# Altium PCB TwoChipAdapter.PcbDoc
Units mil, origin at the board's own origin, x right, y up, seen from the top; angles counter-clockwise.
Board outline 700 x 2400 mil, 2 copper layers (Top Layer, Bottom Layer); 20 components, 19 nets, 80 pads, 17 vias.
Unrouted connection lines stored in the file: 2.
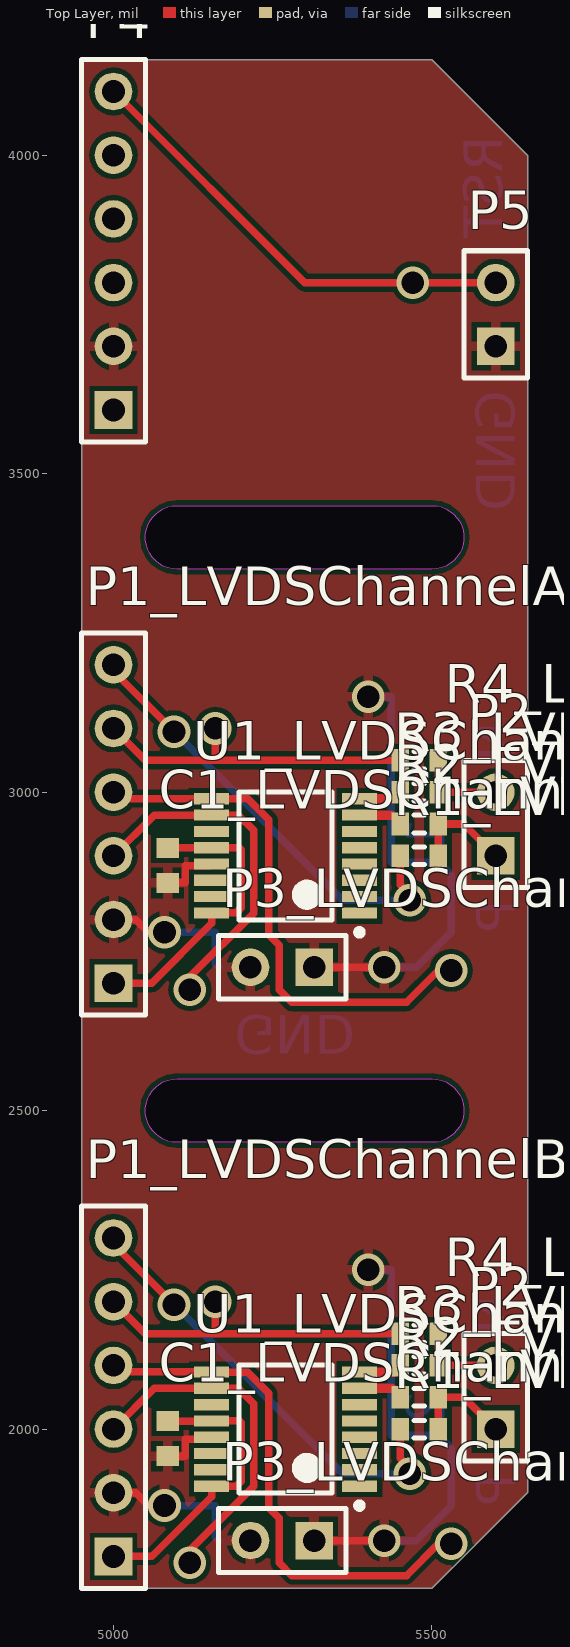
[diagram p0: Top Layer view]
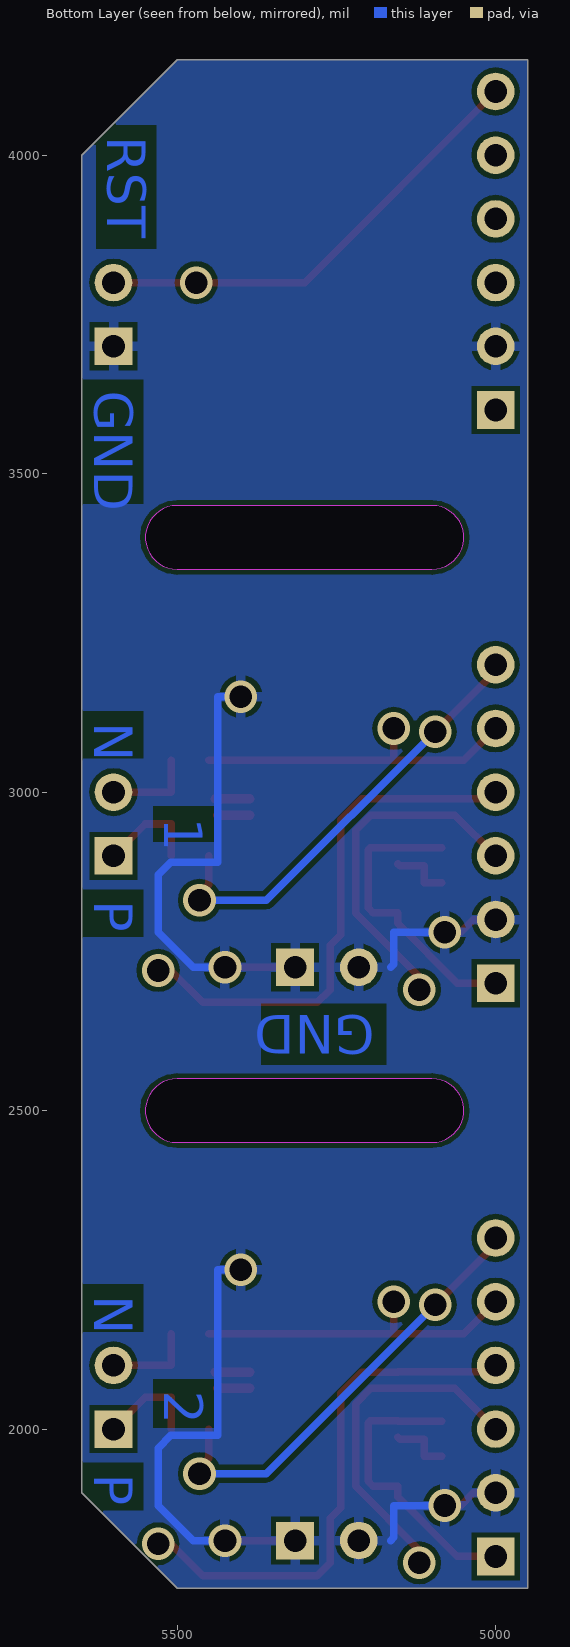
[diagram p1: Bottom Layer view, seen from below]

## Layer stack, top to bottom
Top Solder: solder mask 0.4, Solder Resist, Dk 3.5
Top Layer: signal copper 1.4
Dielectric 1: dielectric 12.6, FR-4, Dk 4.8
Bottom Layer: signal copper 1.4
Bottom Solder: solder mask 0.4, Solder Resist, Dk 3.5

## Board outline
4950,4150 5500,4150 5650,4000 5650,1900 5500,1750 4950,1750 4950,4150
cut-out: 5100,2450 cw(c5100,2500) 5100,2550 5500,2550 cw(c5500,2500) 5500,2450
cut-out: 5100,3350 cw(c5100,3400) 5100,3450 5500,3450 cw(c5500,3400) 5500,3350
board region "Default Layer Stack Region": 5650,3400 5650,2500 4950,2500 4950,3400
board region "Default Layer Stack Region": 5650,2500 5650,1900 5500,1750 4950,1750 4950,2500
board region "Default Layer Stack Region": 4950,3400 4950,4150 5500,4150 5650,4000 5650,3400

## Design rules (kind name [scope] priority, off if disabled: settings)
Clearance [All] p1: gap=7.87
DiffPairsRouting [All] p1: maxlimit=10 minlimit=10 mostfreqgap=10 toplayer_minwidth=15 toplayer_maxwidth=15 toplayer_prefwidth=15 bottomlayer_minwidth=15 bottomlayer_maxwidth=15 bottomlayer_prefwidth=15 maxuncoupledlength=500
PolygonConnect [All] p1: connectstyle=Relief reliefconductorwidth=15.75 reliefentries=4 polygonreliefangle="90 Angle" airgapwidth=7.87
RoomDefinition TopAdapter [InComponentClass('TopAdapter')] p1: confinementstyle=ConfineIn formatcopy=TRUE lockcomponents=FALSE outline 4900,3500 5700,3500 5700,4200 4900,4200
RoomDefinition LVDSChannelB [InComponentClass('LVDSChannelB')] p2: confinementstyle=ConfineIn formatcopy=TRUE lockcomponents=FALSE outline 4900,1700 5700,1700 5700,2400 4900,2400
RoomDefinition LVDSChannelA [InComponentClass('LVDSChannelA')] p3: confinementstyle=ConfineIn formatcopy=TRUE lockcomponents=FALSE outline 4900,2600 5700,2600 5700,3300 4900,3300
RoutingVias [All] p1: holewidth=35.43 width=47.24 viastyle="Through Hole" minholewidth=31.5 minwidth=47.24 maxholewidth=39.37 maxwidth=55.12
SolderMaskExpansion [All] p1: expansion=4
UnpouredPolygon [All] p1: allowunpoured=FALSE
Width [All] p1: maxlimit=39.37 minlimit=9.84 preferedwidth=10
28 further rules are at their usual default settings.

## Classes and differential pairs
channel class LVDS_Channel: LVDSChannelA LVDSChannelB
component class LVDSChannelB: C1_LVDSChannelB P1_LVDSChannelB P2_LVDSChannelB P3_LVDSChannelB R1_LVDSChannelB R2_LVDSChannelB R3_LVDSChannelB R4_LVDSChannelB U1_LVDSChannelB
component class LVDSChannelA: C1_LVDSChannelA P1_LVDSChannelA P2_LVDSChannelA P3_LVDSChannelA R1_LVDSChannelA R2_LVDSChannelA R3_LVDSChannelA R4_LVDSChannelA U1_LVDSChannelA
component class TopAdapter: P4 P5
differential pair DOUT1_LVDSChannelB: +DOUT1_LVDSChannelB_P -DOUT1_LVDSChannelB_N
differential pair DOUT1_LVDSChannelA: +DOUT1_LVDSChannelA_P -DOUT1_LVDSChannelA_N

## Components (designator, comment, footprint, x,y, rotation, side; value= is the part's Value field where it differs from the comment)
C1_LVDSChannelA "Cap Semi" 1608[0603] 5085,2885 r90 top (schematic designator C1)
C1_LVDSChannelB "Cap Semi" 1608[0603] 5085,1985 r90 top (schematic designator C1)
P1_LVDSChannelA "Header 6" HDR1X6 5000,2700 r90 top (schematic designator P1)
P1_LVDSChannelB "Header 6" HDR1X6 5000,1800 r90 top (schematic designator P1)
P2_LVDSChannelA "Header 2" HDR1X2 5600,2900 r90 top (schematic designator P2)
P2_LVDSChannelB "Header 2" HDR1X2 5600,2000 r90 top (schematic designator P2)
P3_LVDSChannelA "Header 2" HDR1X2 5315,2725 r180 top (schematic designator P3)
P3_LVDSChannelB "Header 2" HDR1X2 5315,1825 r180 top (schematic designator P3)
P4 "Header 6" HDR1X6 5000,3600 r90 top
P5 "Header 2" HDR1X2 5600,3700 r90 top
R1_LVDSChannelA "Res3" J1-0603 5480,2900 r180 top (schematic designator R1)
R1_LVDSChannelB "Res3" J1-0603 5480,2000 r180 top (schematic designator R1)
R2_LVDSChannelA "Res3" J1-0603 5480,2950 r180 top (schematic designator R2)
R2_LVDSChannelB "Res3" J1-0603 5480,2050 r180 top (schematic designator R2)
R3_LVDSChannelA "Res3" J1-0603 5480,3000 r180 top (schematic designator R3)
R3_LVDSChannelB "Res3" J1-0603 5480,2100 r180 top (schematic designator R3)
R4_LVDSChannelA "Res3" J1-0603 5480,3050 r0 top (schematic designator R4)
R4_LVDSChannelB "Res3" J1-0603 5480,2150 r0 top (schematic designator R4)
U1_LVDSChannelA "SN65LVDS049" SOP127P600-8N 5270,2900 r180 top (schematic designator U1)
U1_LVDSChannelB "SN65LVDS049" SOP127P600-8N 5270,2000 r180 top (schematic designator U1)

## Footprints (in the part's own frame and the unit in brackets; to place one, negate y for a bottom-side part, rotate by r counter-clockwise, add the part's x,y. Pads: shape width x height; smd on the part's side, far side on the other; paste and mask are expansions set on the pad)
1608[0603] [mm] "Chip Capacitor, Body 1.6x0.8mm, IPC High Density"
  rect 0.8x0.9 smd: 1(-0.7,0) 2(0.7,0)
  body extent -0.87,-0.48 0.87,0.48, height 1.3
HDR1X2 [mm] "Connector; Header; 2 Position"
  rect 1.5x1.5 hole 0.9: 1(0,0)
  round 1.5 hole 0.9: 2(2.54,0)
  silkscreen extent -1.27,-1.27 3.81,1.27
HDR1X6 [mm] "Connector; Header; 6 Position"
  rect 1.5x1.5 hole 0.9: 1(0,0)
  round 1.5 hole 0.9: 2(2.54,0) 3(5.08,0) 4(7.62,0) 5(10.16,0) 6(12.7,0)
  silkscreen extent -1.27,-1.27 13.97,1.27
J1-0603 [mm] "Chip Resistor, Body 1.6x0.8mm, IPC High Density"
  rect 0.7x0.9 smd: 1(-0.75,0) 2(0.75,0)
  silkscreen extent -0.2,-0.35 0.2,0.35, body extent -0.85,-0.48 0.85,0.48, height 0.9
SOP127P600-8N [mm]
  rect 1.4x0.45 smd: 1(-2.95,2.275) 2(-2.95,1.625) 3(-2.95,0.975) 4(-2.95,0.325) 5(-2.95,-0.325) 6(-2.95,-0.975) 7(-2.95,-1.625) 8(-2.95,-2.275) 9(2.95,-2.275) 10(2.95,-1.625) 11(2.95,-0.975) 12(2.95,-0.325) 13(2.95,0.325) 14(2.95,0.975) 15(2.95,1.625) 16(2.95,2.275)
  silkscreen extent -3.08,-2.55 1.85,3.17, body extent -2.25,-2.55 2.25,2.55, height 1.2

## Part data
C1_LVDSChannelA C1_LVDSChannelB: "Capacitor (Semiconductor SIM Model)"
P1_LVDSChannelA P1_LVDSChannelB P4: "Header, 6-Pin"
P2_LVDSChannelA P2_LVDSChannelB P3_LVDSChannelA P3_LVDSChannelB P5: "Header, 2-Pin"
R1_LVDSChannelA R1_LVDSChannelB R2_LVDSChannelA R2_LVDSChannelB R3_LVDSChannelA R3_LVDSChannelB R4_LVDSChannelA R4_LVDSChannelB: "Resistor"

## Via types
v1: diameter 51.18, hole 35.43, Top Layer to Bottom Layer, 17 vias

## Nets (pads, with @x,y where several pads share a name; then routed paths per layer and width w, separated by ;. In a path a pad name is that pad's centre, name@x,y a point inside that pad or via, vN(x,y) a via of type N, cw(c..) or ccw(c..) an arc to the next point about the centre after c; other vN are vias at no path point)
3V3: C1_LVDSChannelA.2 C1_LVDSChannelB.2 P1_LVDSChannelA.1 P1_LVDSChannelB.1 P4.1 U1_LVDSChannelA.12 U1_LVDSChannelA.16 U1_LVDSChannelB.12 U1_LVDSChannelB.16 | length 942.7
  Top Layer w11.81: P1_LVDSChannelB.1@5000,1790 5010,1800 5060,1800 5153.86,1893.86 U1_LVDSChannelB.16 5192.59,1910.43 5200.31,1918.15 5200.31,2009.68 5197.2,2012.8 U1_LVDSChannelB.12 5153.62,2012.56 C1_LVDSChannelB.2 ; P1_LVDSChannelA.1@5000,2690 5010,2700 5060,2700 5153.86,2793.86 U1_LVDSChannelA.16 5192.59,2810.43 5200.31,2818.15 5200.31,2909.68 5197.2,2912.8 U1_LVDSChannelA.12 5153.62,2912.56 C1_LVDSChannelA.2
DIN_LVDSChannelA: P1_LVDSChannelA.3 U1_LVDSChannelA.10 | length 572
  Top Layer w11.81: P1_LVDSChannelA.3@5000,2890 P1_LVDSChannelA.3 5063.98,2963.98 U1_LVDSChannelA.10 5196.02,2963.98 5220,2940 5220,2810 5120,2710 v1(5120,2690)
  Bottom Layer w11.81: v1@5110,2680 v1(5120,2690)
DIN_LVDSChannelB: P1_LVDSChannelB.3 U1_LVDSChannelB.10 | length 572
  Top Layer w11.81: P1_LVDSChannelB.3@5000,1990 P1_LVDSChannelB.3 5063.98,2063.98 U1_LVDSChannelB.10 5196.02,2063.98 5220,2040 5220,1910 5120,1810 v1(5120,1790)
  Bottom Layer w11.81: v1@5110,1780 v1(5120,1790)
DOUT1_LVDSChannelA_N: R3_LVDSChannelA.2 U1_LVDSChannelA.8 | length 53.9
  Top Layer w15: U1_LVDSChannelA.8 R3_LVDSChannelA.2@5440.04,2989.57
DOUT1_LVDSChannelA_P: R2_LVDSChannelA.2 U1_LVDSChannelA.7 | length 50.4
  Top Layer w15: U1_LVDSChannelA.7 5436.5,2963.98
DOUT1_LVDSChannelB_N: R3_LVDSChannelB.2 U1_LVDSChannelB.8 | length 53.9
  Top Layer w15: U1_LVDSChannelB.8 R3_LVDSChannelB.2@5440.04,2089.57
DOUT1_LVDSChannelB_P: R2_LVDSChannelB.2 U1_LVDSChannelB.7 | length 50.4
  Top Layer w15: U1_LVDSChannelB.7 5436.5,2063.98
GND: C1_LVDSChannelA.1 C1_LVDSChannelB.1 P1_LVDSChannelA.2 P1_LVDSChannelB.2 P3_LVDSChannelA.1 P3_LVDSChannelA.2 P3_LVDSChannelB.1 P3_LVDSChannelB.2 P4.2 P5.1 U1_LVDSChannelA.13 U1_LVDSChannelB.13 | length 2096.6
  Top Layer w11.81: P1_LVDSChannelB.2 5035.16,1900 5055.16,1880 v1(5080,1880) ; P1_LVDSChannelA.2 5035.16,2800 5055.16,2780 v1(5080,2780) ; C1_LVDSChannelB.1 5112.52,1957.44 5112.52,1984.25 5150.91,1984.25 U1_LVDSChannelB.13 ; C1_LVDSChannelA.1 5112.52,2857.44 5112.52,2884.25 5150.91,2884.25 U1_LVDSChannelA.13 ; P3_LVDSChannelB.1 v1(5425,1825) ; P3_LVDSChannelA.1 v1(5425,2725)
  Bottom Layer w11.81: v1(5080,1880) 5160,1880 5160,1830 5165,1825 ; v1(5080,2780) 5160,2780 5160,2730 5165,2725 ; v1(5400,2250) 5436.24,2250 5436.24,1990 5510,1990 5530,1970 5530,1880 5475,1825 v1(5425,1825) ; v1(5400,3150) 5436.24,3150 5436.24,2890 5510,2890 5530,2870 5530,2780 5475,2725 v1(5425,2725)
NBIAS_LVDSChannelA: P1_LVDSChannelA.5 R4_LVDSChannelA.1 | length 517
  Top Layer w11.81: P1_LVDSChannelA.5@5000,3090 5010,3090 5050,3050 5160,3050 ; v1(5160,3100) 5160,3050 ; R4_LVDSChannelA.1 5160,3050
NBIAS_LVDSChannelB: P1_LVDSChannelB.5 R4_LVDSChannelB.1 | length 517
  Top Layer w11.81: P1_LVDSChannelB.5@5000,2190 5010,2190 5050,2150 5160,2150 ; v1(5160,2200) 5160,2150 ; R4_LVDSChannelB.1 5160,2150
NEN_LVDSChannelA: P1_LVDSChannelA.4 U1_LVDSChannelA.9 | length 829.1
  Top Layer w11.81: P1_LVDSChannelA.4@5000,2990 U1_LVDSChannelA.9@5153.43,2990 ; U1_LVDSChannelA.9 5210.43,2989.57 5243.57,2956.43 5243.57,2776.43 5260,2760 5260,2690 5280,2670 5460,2670 5510,2720 v1(5530,2720)
NEN_LVDSChannelB: P1_LVDSChannelB.4 U1_LVDSChannelB.9 | length 829.1
  Top Layer w11.81: P1_LVDSChannelB.4@5000,2090 U1_LVDSChannelB.9@5153.43,2090 ; U1_LVDSChannelB.9 5210.43,2089.57 5243.57,2056.43 5243.57,1876.43 5260,1860 5260,1790 5280,1770 5460,1770 5510,1820 v1(5530,1820)
NetP2_LVDSChannelA_1: P2_LVDSChannelA.1 R1_LVDSChannelA.1 R2_LVDSChannelA.1 | length 161.2
  Top Layer w11.81: R1_LVDSChannelA.1 R2_LVDSChannelA.1 5550,2950 P2_LVDSChannelA.1
NetP2_LVDSChannelA_2: P2_LVDSChannelA.2 R3_LVDSChannelA.1 R4_LVDSChannelA.2 | length 140.5
  Top Layer w11.81: R4_LVDSChannelA.2 R3_LVDSChannelA.1 P2_LVDSChannelA.2
NetP2_LVDSChannelB_1: P2_LVDSChannelB.1 R1_LVDSChannelB.1 R2_LVDSChannelB.1 | length 161.2
  Top Layer w11.81: R1_LVDSChannelB.1 R2_LVDSChannelB.1 5550,2050 P2_LVDSChannelB.1
NetP2_LVDSChannelB_2: P2_LVDSChannelB.2 R3_LVDSChannelB.1 R4_LVDSChannelB.2 | length 140.5
  Top Layer w11.81: R4_LVDSChannelB.2 R3_LVDSChannelB.1 P2_LVDSChannelB.2
PBIAS_LVDSChannelA: P1_LVDSChannelA.6 R1_LVDSChannelA.2 | length 690.1
  Top Layer w11.81: P1_LVDSChannelA.6@5000,3190 v1(5095,3095) ; R1_LVDSChannelA.2 5450.47,2854.53 5465,2840 v1(5465,2830)
  Bottom Layer w11.81: v1(5095,3095) 5360,2830 v1(5465,2830)
PBIAS_LVDSChannelB: P1_LVDSChannelB.6 R1_LVDSChannelB.2 | length 690.1
  Top Layer w11.81: P1_LVDSChannelB.6@5000,2290 v1(5095,2195) ; R1_LVDSChannelB.2 5450.47,1954.53 5465,1940 v1(5465,1930)
  Bottom Layer w11.81: v1(5095,2195) 5360,1930 v1(5465,1930)
RST: P4.6 P5.2 | length 724.3
  Top Layer w11.81: P4.6 5300,3800 v1(5470,3800) P5.2
pads on no net: P4.3 P4.4 P4.5 U1_LVDSChannelA.1 U1_LVDSChannelA.2 U1_LVDSChannelA.3 U1_LVDSChannelA.4 U1_LVDSChannelA.5 U1_LVDSChannelA.6 U1_LVDSChannelA.11 U1_LVDSChannelA.14 U1_LVDSChannelA.15 U1_LVDSChannelB.1 U1_LVDSChannelB.2 U1_LVDSChannelB.3 U1_LVDSChannelB.4 U1_LVDSChannelB.5 U1_LVDSChannelB.6 U1_LVDSChannelB.11 U1_LVDSChannelB.14 U1_LVDSChannelB.15

## Polygon pours and split planes (outlines as drawn)
GND on Top Layer "Top Layer-No Net" (solid, pour order 8): 4950,4150 5500,4150 5650,4000 5650,1900 5500,1750 4950,1750 4950,4150
GND on Bottom Layer "Top Layer-GND" (solid, pour order 9): 4950,4150 5500,4150 5650,4000 5650,1900 5500,1750 4950,1750 4950,4150

## Other copper
Bottom Layer:
  text "RST" at 5610,4030 h60 r90
  text "GND" at 5630,3630 h60 r90
  text "N" at 5630,3110 h60 r90
  text "1" at 5520,2960 h60 r90
  text "P" at 5630,2830 h60 r90
  text "GND" at 5190,2650 h60 r180
  text "N" at 5630,2210 h60 r90
  text "2" at 5520,2060 h60 r90
  text "P" at 5630,1930 h60 r90

## Silkscreen, mask and mechanical layers (free items; w line width, h text height)
Mechanical 1:
  lines w10: 5100,2450 cw(c5100,2500) 5100,2550 5500,2550 cw(c5500,2500) 5500,2450 5100,2450 ; 5100,3350 cw(c5100,3400) 5100,3450 5500,3450 cw(c5500,3400) 5500,3350 5100,3350
  lines w47.24: 4950,1750 4950,4150 5500,4150 5650,4000 5650,1900 5500,1750 4950,1750